# Altium PCB SUBBOARD-power_stage.PcbDoc (part 2 of 2)
Units mm, origin at the board's own origin, x right, y up, seen from the top; angles counter-clockwise.
Board outline 150 x 85 mm, 2 copper layers (Top Layer, Bottom Layer), stack 1.569 mm thick; 73 components, 29 nets, 169 pads, 334 vias.
Unrouted connection lines stored in the file: 3.
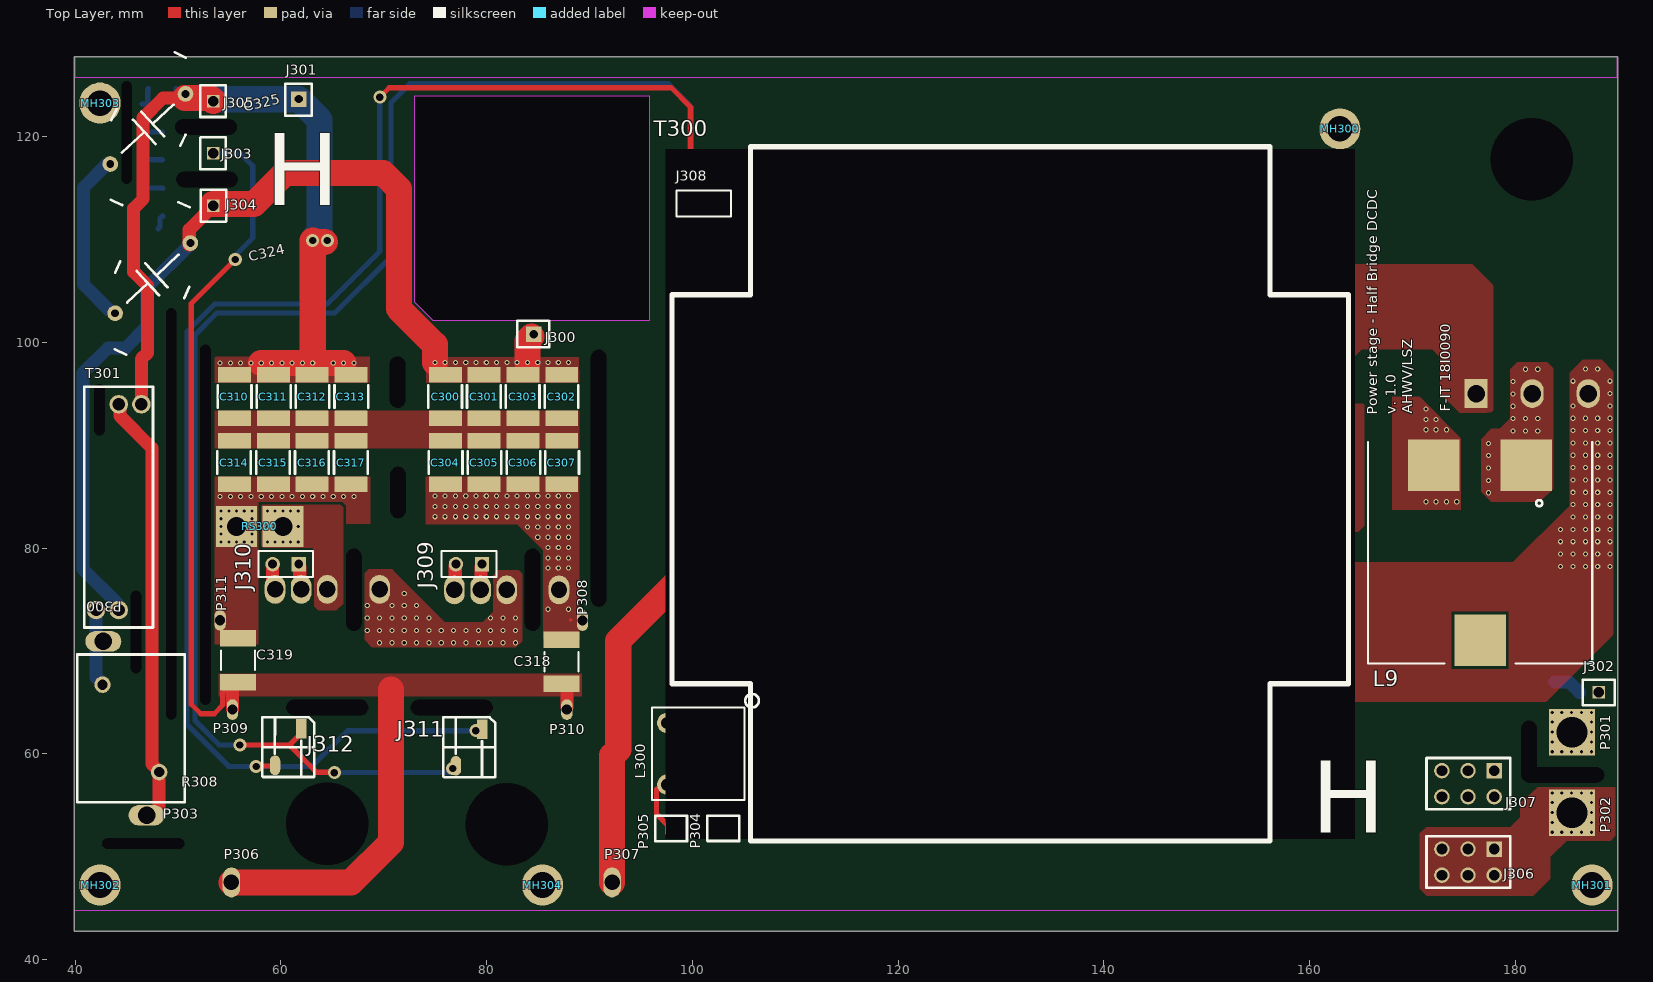
[diagram p0: Top Layer view]

## Via types
v1: diameter 0.5, hole 0.3, Top Layer to Bottom Layer, 325 vias
v2: diameter 1.27, hole 0.711, Top Layer to Bottom Layer, 9 vias

## Nets (pads, with @x,y where several pads share a name; then routed paths per layer and width w, separated by ;. In a path a pad name is that pad's centre, name@x,y a point inside that pad or via, vN(x,y) a via of type N, cw(c..) or ccw(c..) an arc to the next point about the centre after c; other vN are vias at no path point) (continued)
S2: (continued)
  Top Layer w0.508: J310.1@61.71,78.276 J310.1@61.845,78.141 ; Q301.3@61.81,76.086 Q301.3@61.845,76.121
  Top Layer w1.27: Q301.3@61.845,76.121 J310.1@61.845,78.141
VCC_18V: J308.1 J311.1 J312.2 | length 149
  Top Layer w0.508: v2(57.6,58.775) 57.652,58.827 59.389,58.827 J312.2 J312.2@59.457,58.862 ; v2(69.625,123.825) 70.535,124.735 97.965,124.735 99.837,122.863 J308.1
  Bottom Layer w0.508: v2(69.625,123.825) 69.625,108.828 64.522,103.725 53.575,103.725 50.875,101.025 50.875,62.85 54.95,58.775 v2(57.6,58.775) 63,58.775 66.475,62.25 v2@78.956,62.25
  other v2: 78.956,62.256
pads on no net: D300.* L9.3 MH300.* MH301.* MH302.* MH303.* MH304.* Q300.* Q301.* T300. T300.2

## Polygon pours and split planes (outlines as drawn)
DCl_N on Top Layer "DCl_N_L-01_P-001" (solid, pour order 77): 171.32,52.864 179.489,52.864 180.45,53.825 180.45,55.19 182.182,56.75 189.7,56.75 189.7,52.025 189.25,51.575 184.975,51.575 183.375,49.975 183.375,47.861 181.732,46.218 171.406,46.218 170.725,46.899 170.725,52.269
ACt_P on Top Layer "Poly_HP_ACt_P_Top" (solid, pour order 67): 80.66,77.38 81.126,77.846 83.124,77.846 83.45,77.52 83.45,70.946 82.854,70.35 68.856,70.35 68.14,71.066 68.14,77.536 68.53,77.926 70.82,77.926 71.1,77.646 75.956,72.79 79.62,72.79 80.66,73.83
ACts_N on Top Layer "Poly_ACts_N_Bot" (solid, pour order 56): 185.26,97.016 186.544,98.28 188.38,98.28 189.51,97.15 189.51,71.585 182.995,65.07 157.31,65.07 156.54,65.84 156.54,77.75 157.39,78.6 179.76,78.6 185.26,84.1
ACres_N on Top Layer "Poly_ACres_N_Top1" (solid, pour order 69): 89.25,65.575 89.25,67.8 53.97,67.8 53.97,65.575
DCo_N on Top Layer "Poly_HP_DCo_N" (solid, pour order 52): 57.83,70.65 53.58,70.65 53.58,86.94 68.68,86.94 68.68,82.37 66.38,82.37 66.38,84.11 65.984,84.506 57.83,84.506
DCo_P on Top Layer "Poly_HP_DCo_P" (solid, pour order 29): 89.02,86.95 89.02,71.175 85.513,71.175 85.513,79.779 82.992,82.3 74.113,82.3 74.113,86.95
ACts_P on Top Layer "Poly_ACts_P_Top" (solid, pour order 55): 156.58,105.805 158.35,107.575 175.825,107.575 177.86,105.54 177.86,93.39 177.6,93.13 174.57,93.13 172.71,94.99 172.71,98.54 171.925,99.325 165.075,99.325 164.201,98.451 164.204,97.354 163.57,96.72 156.58,96.72
ACts_M on Top Layer "ACts_M_L-01_P-001" (solid, pour order 76): 156.54,90.53 160.02,94.01 165.25,94.01 165.3,93.96 165.3,82.16 164.71,81.57 157.15,81.57 156.54,82.18
DCf_P on Top Layer "Poly_DCf_P_Top" (solid, pour order 54): 179.49,97.37 180.18,98.06 183.09,98.06 183.66,97.49 183.66,85.76 182.38,84.48 177.63,84.48 176.66,85.45 176.66,89.916 176.66,90.586 177.674,91.6 178.49,91.6 179.49,92.6
DCo_N on Top Layer "Poly_HP_DCo_N_Top2" (solid, pour order 71): 53.57,96.057 68.65,96.057 68.65,98.575 53.57,98.575
DCo_P on Top Layer "Poly_HP_DCo_N_Top2" (solid, pour order 72): 74.125,96.083 88.985,96.082 88.985,98.55 74.125,98.55
DC_N_shunt on Top Layer "Poly_HP_DC_N_shunt" (solid, pour order 62): 63.26,79.806 63.04,80.026 58.284,80.026 58.05,80.26 58.05,84.056 58.22,84.226 65.8,84.226 66.06,83.966 66.06,79.346 66.06,74.596 65.41,73.946 63.64,73.946 63.26,74.326
DCo_M on Top Layer "Poly_HP_DCo_M" (solid, pour order 63): 53.56,93.35 89.02,93.35 89.02,89.69 53.56,89.69
DCl_P on Top Layer "Poly_DClm_P_Top" (solid, pour order 58): 168.02,83.73 168.02,94.69 170.68,94.69 174.71,90.66 174.71,84.56 174.71,83.73
ACtp_N on Bottom Layer "ACtp_N_L-02_P-001" (solid, pour order 78): 102.225,61.3 104.85,61.3 105.2,61.65 105.2,70.45 103,72.65 99.075,72.65 98.1,71.675 98.1,67.3 101.8,63.6 101.8,61.725
ACt_P on Bottom Layer "Poly_HP_ACt_P" (solid, pour order 65): 80.66,77.38 81.106,77.826 83.144,77.826 83.45,77.52 83.45,69.306 84.006,68.75 93.605,68.75 97.384,64.5 99.125,64.5 99.125,61.275 95.9,61.275 90.975,66.2 81.16,66.2 76.96,70.4 68.82,70.4 68.14,71.08 68.14,77.526 68.52,77.906 70.81,77.906 71.09,77.626 75.926,72.79 79.62,72.79 80.66,73.83
DCl_P on Bottom Layer "Poly_DClm_P_Bot" (solid, pour order 59): 189.475,59.343 182.875,59.358 182.874,62.776 181.861,63.5 175.56,63.5 175.56,73.7 168.02,81.24 168.02,94.64 170.68,94.64 174.69,90.63 174.69,83.68 180.74,77.63 189.475,68.895
ACts_M on Bottom Layer "Poly_ACts_M_Bot" (solid, pour order 57): 156.55,94.675 165.29,94.675 165.29,78.85 172.07,72.07 172.07,60.955 173.15,59.875 179.625,59.875 179.625,53.925 156.55,53.925
DCo_P on Bottom Layer "Poly_HP_DCo_P_Bot2" (solid, pour order 73): 74.11,82.3 82.99,82.3 85.51,79.78 85.51,72.56 89.02,72.56 89.02,98.65 74.11,98.65
ACts_N on Bottom Layer "Poly_ACts_N_Bot1" (solid, pour order 70): 185.26,97.09 185.35,97.09 186.54,98.28 188.39,98.28 189.51,97.16 189.51,77.8 183.97,77.8 183.97,82.81 185.26,84.1
DCf_P on Bottom Layer "Poly_DCf_P_Bot" (solid, pour order 60): 179.49,97.38 180.17,98.06 183.06,98.06 183.66,97.46 183.66,85.76 182.38,84.48 177.63,84.48 176.66,85.45 176.66,90.59 177.67,91.6 178.49,91.6 179.49,92.6
DCo_N on Bottom Layer "Poly_HP_DCo_N_Bot2" (solid, pour order 75): 53.56,79.99 57.83,79.99 57.83,84.51 65.98,84.51 66.38,84.11 66.38,82.36 68.66,82.36 68.66,98.725 53.56,98.725
DC_N_shunt on Bottom Layer "Poly_HP_DC_N_shunt_Bot" (solid, pour order 66): 63.26,79.806 63.04,80.026 58.284,80.026 58.09,80.22 58.09,84.096 58.22,84.226 65.8,84.226 66.06,83.966 66.06,79.346 66.06,74.596 65.41,73.946 63.64,73.946 63.26,74.326
CHASIS on Bottom Solder "NONET_L-01_P-001" (solid): 40.175,112.25 41.475,112.25 41.475,108.225 40.175,108.225
CHASIS on Bottom Paste "NONET_L-01_P-001" (solid): 40.2,112.225 41.45,112.225 41.45,108.225 40.2,108.225

## Keep-outs
Keep-Out Layer:
  rectangle: 39.937,42.745 189.938,44.751
  rectangle: 39.952,125.752 189.913,127.733

## Silkscreen, mask and mechanical layers (free items; w line width, h text height)
Top Overlay:
  text "H" at 58.478,111.053 h12
  text "F-IT 18I0090" at 173.675,93.225 h1 r90
  text "AHWV/LSZ" at 169.975,93.05 h1 r90
  text "Power stage - Half Bridge DCDC" at 166.582,92.98 h1 r90
  text "v. 1.0" at 168.375,93 h1 r90
  text "H" at 160.147,50.022 h12
Bottom Overlay:
  text "g" at 40.868,106.657 h5 r270
  text "X" at 84.882,87.216 h12
  text "H" at 65.065,86.408 h12
Mechanical 2:
  lines w0.254: 39.937,125.117 39.937,127.745 ; 39.937,42.745 39.937,127.745 ; 39.937,42.745 189.937,42.745 ; 39.937,42.745 39.937,127.745 ; 39.937,42.745 189.937,42.745 ; 39.937,127.745 189.937,127.745 ; 39.937,127.745 189.937,127.745 ; 189.937,42.745 189.937,127.745 ; 189.937,42.745 189.937,127.745 ; 73,103.9 73,123.981 95.825,123.981 95.825,102.075 74.825,102.075 73,103.9
Dimensions:
  lines w0.254: 39.937,44.745 189.916,44.745 ; 39.937,125.745 189.921,125.745

## Dimensions
85.434,47.245 to 39.937,42.745 on Dimensions
85.434,47.245 to 187.437,47.245 on Dimensions
177.937,58.365 to 188.097,65.985 on Dimensions
162.937,120.745 to 189.937,127.745 on Dimensions
162.937,120.745 to 189.937,127.745 on Dimensions
187.437,47.245 to 189.937,42.745 on Dimensions
189.937,42.745 to 187.437,47.245 on Dimensions
42.437,47.245 to 39.937,42.745 on Dimensions
42.437,47.245 to 39.937,42.745 on Dimensions
42.437,123.245 to 39.937,127.745 on Dimensions
42.437,123.245 to 39.937,127.745 on Dimensions
193.595,84.19 to 201.35,84.55 on Dimensions
102.377,113.482 to 39.937,127.745 on Dimensions
97.58,100.94 to 39.937,127.745 on Dimensions
39.937,42.745 to 39.937,44.745 on Dimensions
39.937,125.745 to 39.937,127.745 on Dimensions
39.937,127.745 to 39.937,42.745 on Dimensions
39.937,127.745 to 189.937,127.745 on Dimensions